# Altium PCB pcb-ldc-hw.PcbDoc (part 1 of 2)
Units mm, origin at the board's own origin, x right, y up, seen from the top; angles counter-clockwise.
Board outline 120 x 80 mm, 2 copper layers (Top Layer, Bottom Layer); 78 components, 30 nets, 198 pads, 2 vias.
Unrouted connection lines stored in the file: 33.
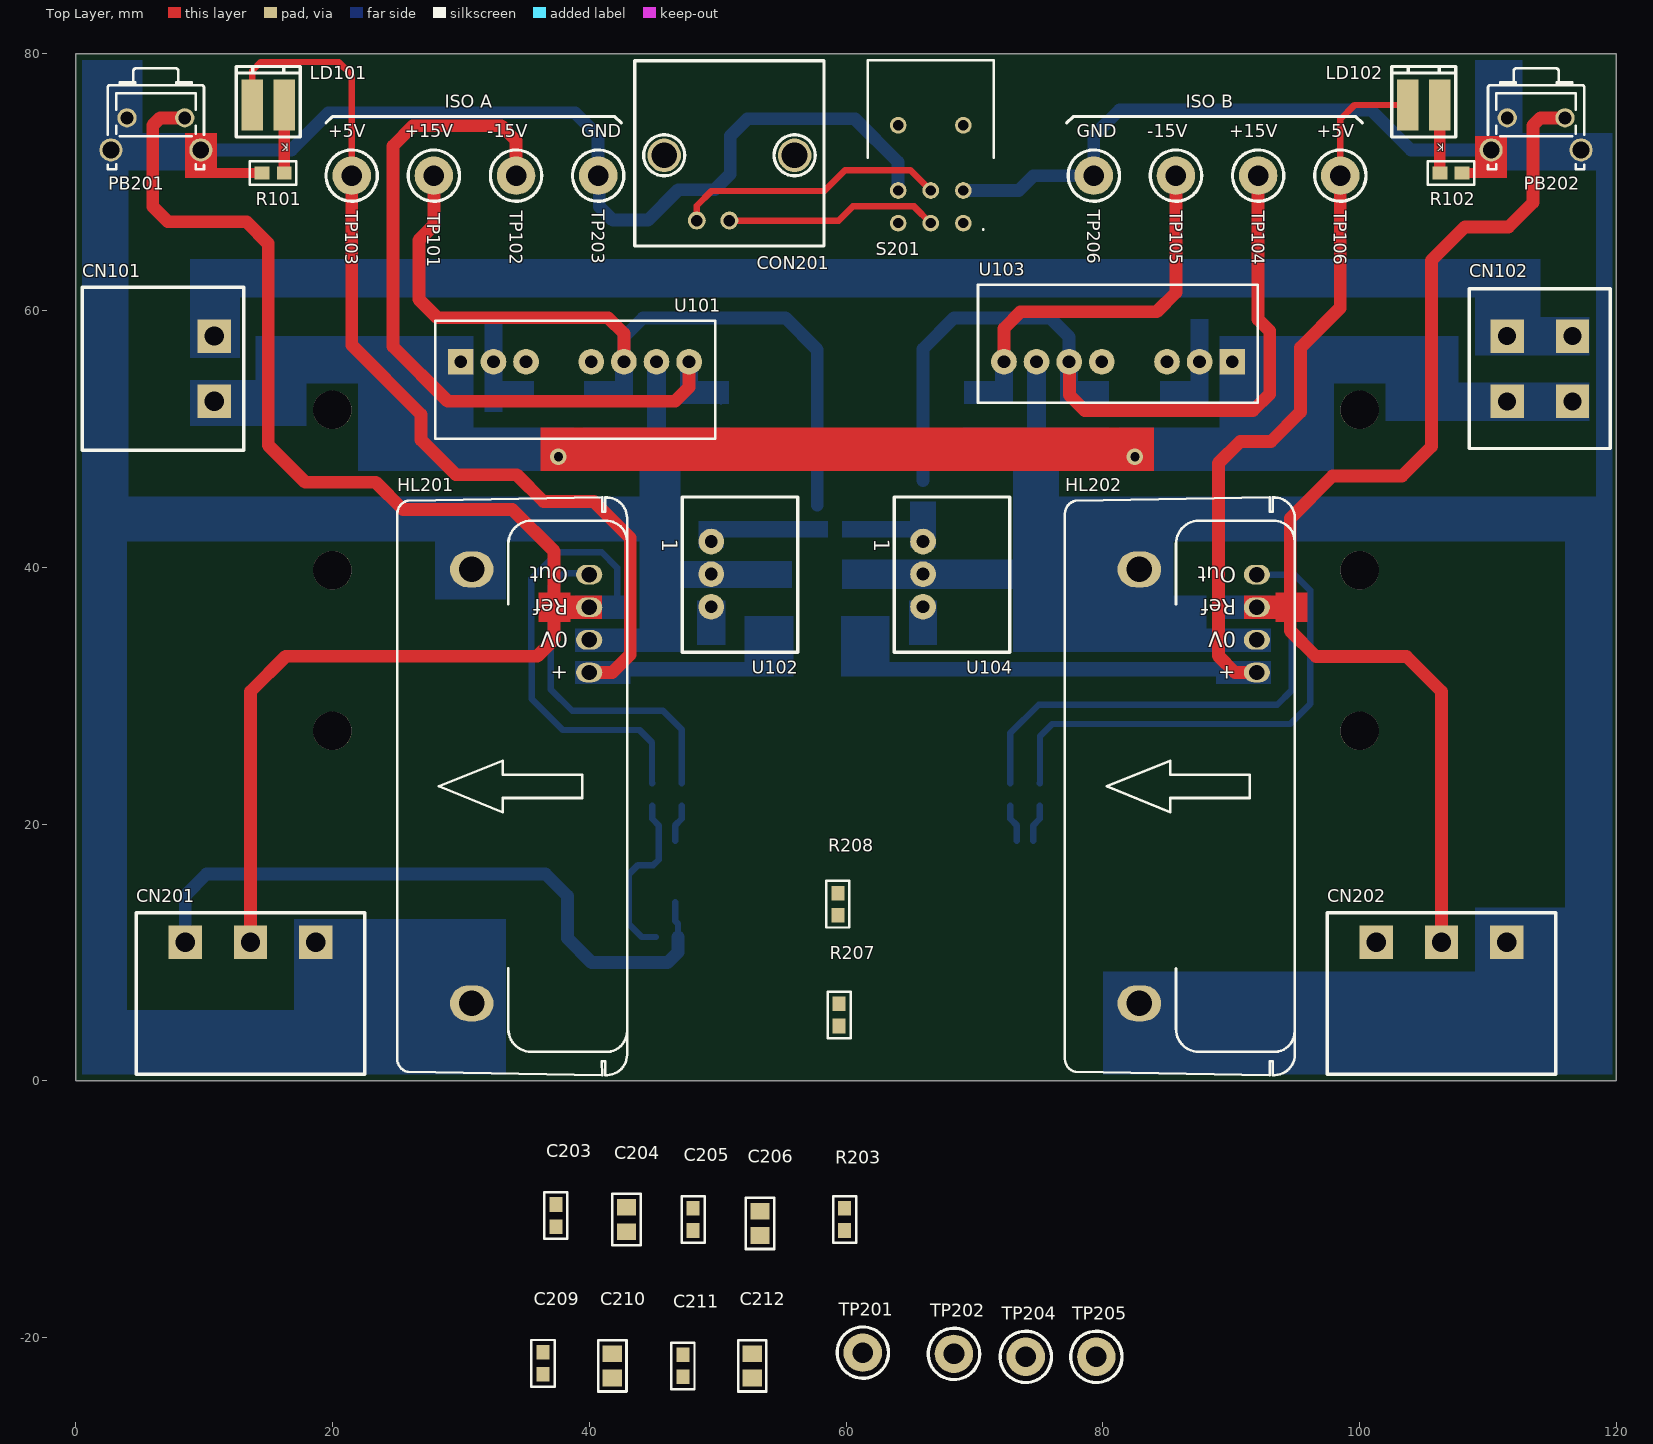
[diagram p0: Top Layer view]
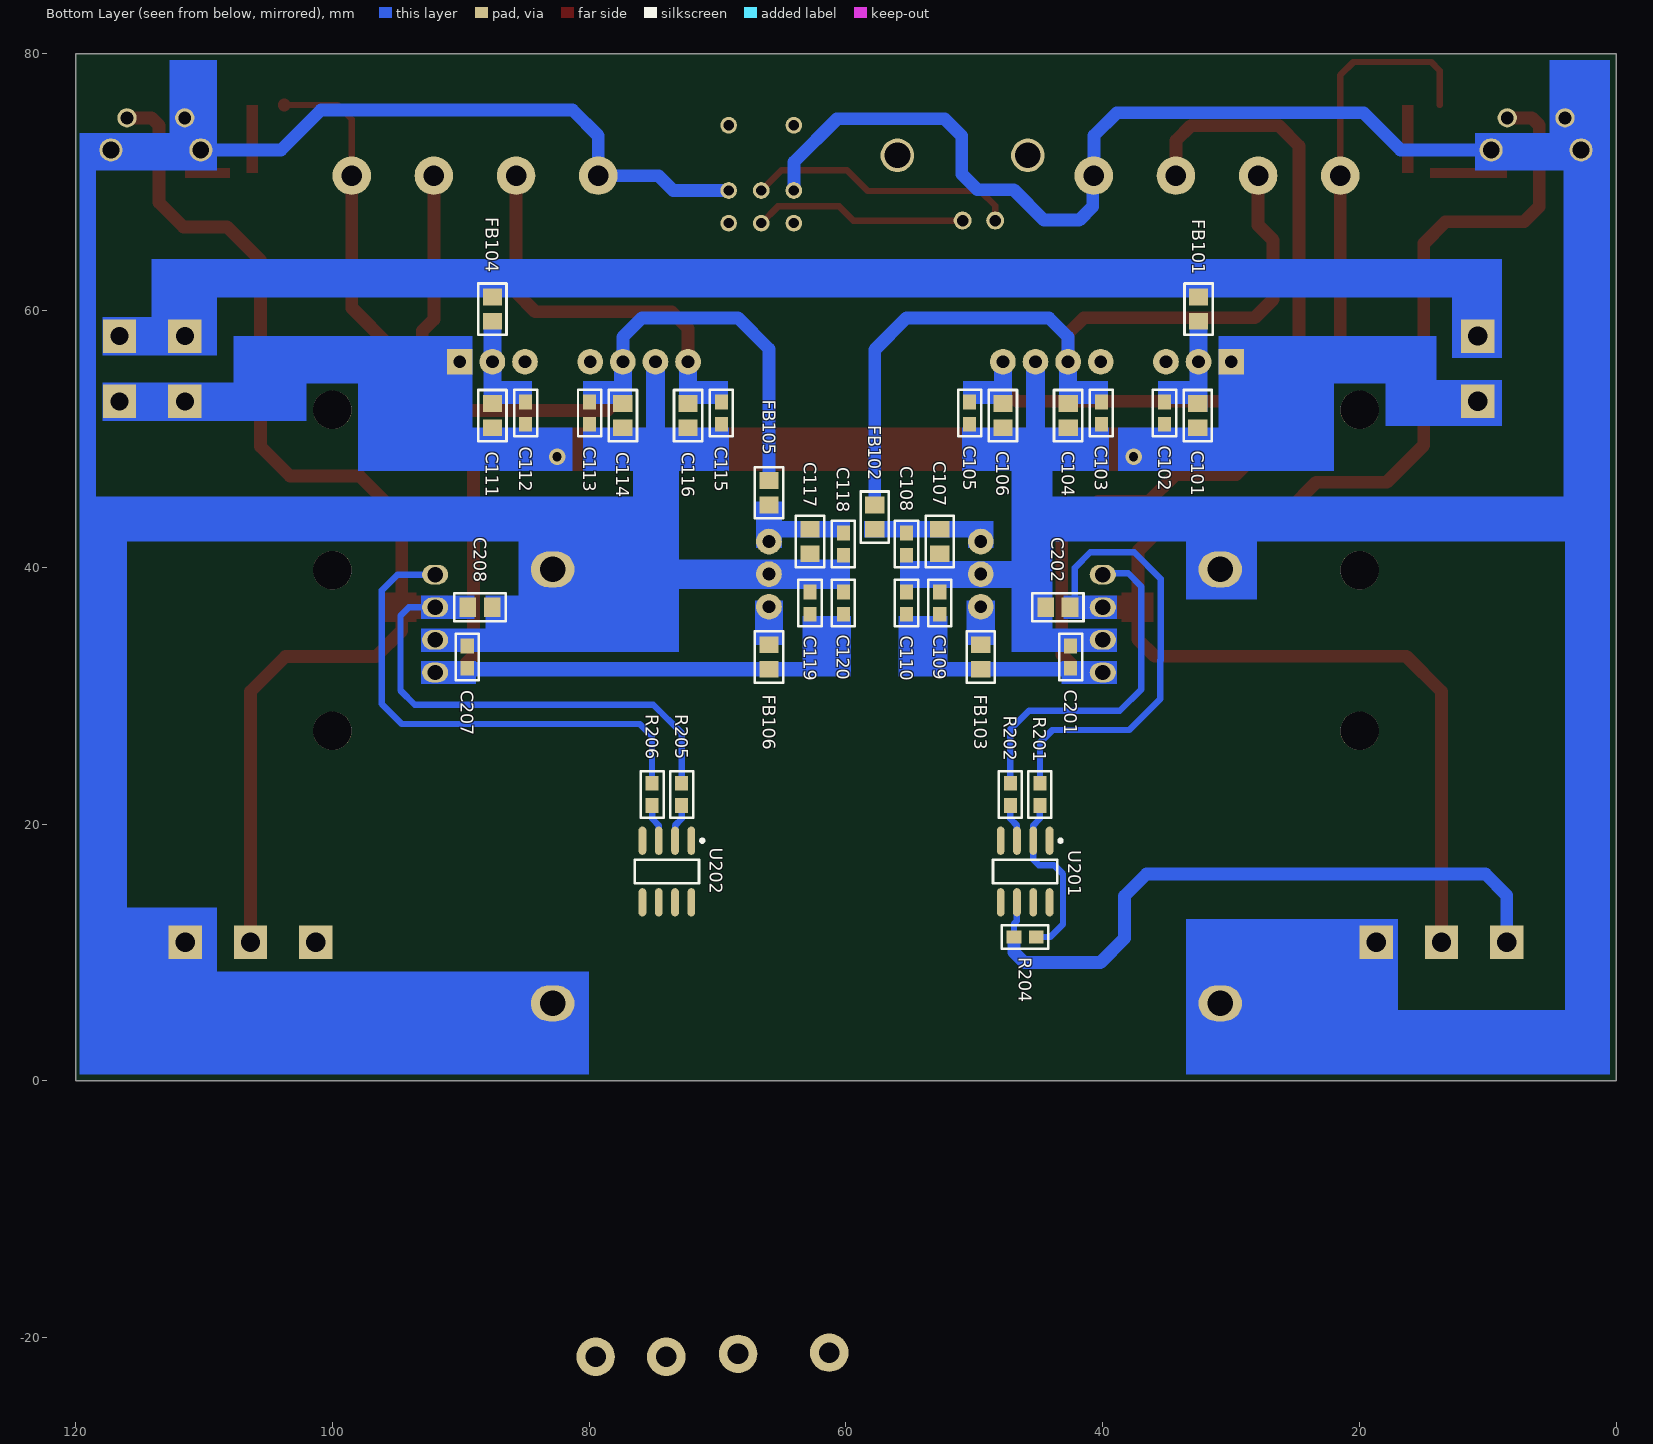
[diagram p1: Bottom Layer view, seen from below]

## Layer stack, top to bottom
Top Solder: solder mask 0.0102, Solder Resist, Dk 3.5
Top Layer: signal copper 0.0356
Dielectric 1: dielectric 0.32, FR-4, Dk 4.8
Bottom Layer: signal copper 0.0356
Bottom Solder: solder mask 0.0102, Solder Resist, Dk 3.5

## Board outline
0,0 0,80 120,80 120,0

## Design rules (kind name [scope] priority, off if disabled: settings)
Clearance [All] p1: gap=0.254 ignorepadtopadclearanceinfootprint=FALSE except(0: Arc-Hole Track-Hole SMDPad-Hole THPad-Hole Via-Hole Fill-Hole Poly-Hole Region-Hole Text-Hole)
Height [All] p1: minheight=0 maxheight=50 prefheight=12.7
PolygonConnect [All] p1: connectstyle=Relief reliefconductorwidth=0.254 reliefentries=4 polygonreliefangle="90 Angle" airgapwidth=0.254
RoutingVias [All] p1: holewidth=0.711 width=1.27 viastyle="Through Hole" minholewidth=0.711 minwidth=1.27 maxholewidth=0.711 maxwidth=1.27
SolderMaskExpansion [All] p1: expansion=0.102 istentingtop=FALSE
Width [All] p1: maxlimit=2 minlimit=0.254 preferedwidth=0.254 minimp=50.000000 maximp=50.000000 favimp=50.000000
29 further rules are at their usual default settings.

## Classes and differential pairs
component class power-supply-ldc-hw: C101 C102 C103 C104 C105 C106 C107 C108 C109 C110 C111 C112 C113 C114 C115 C116 C117 C118 C119 C120 CN101 CN102 FB101 FB102 FB103 FB104 FB105 FB106 LD101 LD102 R101 R102 TP101 TP102 TP103 TP104 TP105 TP106 U101 U102 U103 U104
component class detection-circuit-ldc-hw: C201 C202 C203 C204 C205 C206 C207 C208 C209 C210 C211 C212 CN201 CN202 CON201 HL201 HL202 PB201 PB202 R201 R202 R203 R204 R205 R206 R207 R208 TP201 TP202 TP203 TP204 TP205 TP206 U201 U202

## Components (designator, comment, footprint, x,y, rotation, side; value= is the part's Value field where it differs from the comment)
C101 "10uF/35V" C0805 32.6,51.8 r270 bottom
C102 "100nF/50V" C0603 35.19,52 r90 bottom
C103 "100nF/50V" C0603 40.11,52 r90 bottom
C104 "10uF/35V" C0805 42.7,51.8 r270 bottom
C105 "100nF/50V" C0603 50.37,52 r90 bottom
C106 "10uF/35V" C0805 47.78,51.8 r270 bottom
C107 "10uF/35V" C0805 52.7,42 r270 bottom
C108 "100nF/50V" C0603 55.29,41.8 r90 bottom
C109 "100nF/50V" C0603 52.7,37.2 r270 bottom
C110 "10uF/16V" C0603 55.29,37.2 r270 bottom
C111 "10uF/35V" C0805 87.54,51.8 r270 bottom
C112 "100nF/50V" C0603 84.95,52 r90 bottom
C113 "100nF/50V" C0603 79.97,52 r90 bottom
C114 "10uF/35V" C0805 77.38,51.8 r270 bottom
C115 "100nF/50V" C0603 69.71,52 r90 bottom
C116 "10uF/35V" C0805 72.3,51.8 r270 bottom
C117 "10uF/35V" C0805 62.8,42 r270 bottom
C118 "100nF/50V" C0603 60.21,41.8 r90 bottom
C119 "100nF/50V" C0603 62.8,37.2 r270 bottom
C120 "10uF/16V" C0603 60.21,37.2 r270 bottom
C201 "1uF/16V" C0603 42.5,33 r90 bottom
C202 "220nF/50V" C0805 43.5,36.88 r180 bottom
C203 "100nF/50V" C0603 37.4,-10.5 r90 top
C204 "10uF/35V" C0805 42.9,-10.8 r90 top
C205 "100nF/50V" C0603 48.1,-10.8 r90 top
C206 "10uF/35V" C0805 53.3,-11.1 r90 top
C207 "1uF/16V" C0603 89.5,33 r90 bottom
C208 "220nF/50V" C0805 88.5,36.88 r0 bottom
C209 "100nF/50V" C0603 36.4,-22 r90 top
C210 "10uF/35V" C0805 41.8,-22.2 r90 top
C211 "100nF/50V" C0603 47.3,-22.2 r90 top
C212 "10uF/35V" C0805 52.7,-22.2 r90 top
CN101 "1757242" "CONECTOR PHOENIX CONTACT 1757242" 10.8,58 r270 top locked
CN102 "1786404" "CONECTOR PHOENIX CONTACT 1786404" 111.5,58 r90 top locked
CN201 "1757255" "CONECTOR PHOENIX CONTACT 1757255" 13.62,10.8 r0 top locked
CN202 "1757255" "CONECTOR PHOENIX CONTACT 1757255" 106.38,10.8 r0 top locked
CON201 "BNC_Connector" BNC_RIGHTANGLE 56,72.08 r0 top locked
FB101 "BLM21PG221SN1D" FERRITE_BEAD_0805 32.54,60.1 r90 bottom
FB102 "BLM21PG221SN1D" FERRITE_BEAD_0805 57.76,43.9 r90 bottom
FB103 "BLM21PG221SN1D" FERRITE_BEAD_0805 49.5,33 r90 bottom
FB104 "BLM21PG221SN1D" FERRITE_BEAD_0805 87.54,60.1 r90 bottom
FB105 "BLM21PG221SN1D" FERRITE_BEAD_0805 66,45.8 r90 bottom
FB106 "BLM21PG221SN1D" FERRITE_BEAD_0805 66,33 r90 bottom
HL201 "CTSR 0.3-P" "LEM_CTSR 0.3-P" 40,31.8 r90 top locked
HL202 "CTSR 0.3-P" "LEM_CTSR 0.3-P" 92,31.8 r90 top locked
LD101 "LB A673-L2P1-35-Z" 2-SMD 15,76 r180 top locked
LD102 "LB A673-L2P1-35-Z" 2-SMD 105,76 r180 top locked
PB201 "SKHHLMA010" PB_ALPS_SKHHLMA010 4,75 r270 top locked
PB202 "SKHHLMA010" PB_ALPS_SKHHLMA010 111.5,75 r270 top locked
R101 "499R" R0603 15.38,70.7 r0 top
R102 "499R" R0603 107.12,70.7 r180 top
R201 "15K" R0603 44.9,22.3 r270 bottom
R202 "15K" R0603 47.2,22.3 r270 bottom
R203 "75K" R0603 59.9,-10.8 r90 top
R204 "75K" R0603 46.05,11.2 r0 bottom
R205 "15K" R0603 72.8,22.3 r270 bottom
R206 "15K" R0603 75.1,22.3 r270 bottom
R207 "75K" R0603 59.47,5.13 r90 top
R208 "75K" R0603 59.36,13.75 r270 top
S201 "AS22AH" AS22AH 66.6,66.8 r180 top locked
TP101 "Test Point White 5012" "TEST POINT" 27.9,70.5 r0 top
TP102 "Test Point White 5012" "TEST POINT" 34.3,70.5 r0 top
TP103 "Test Point White 5012" "TEST POINT" 21.5,70.5 r180 top
TP104 "Test Point White 5012" "TEST POINT" 92.1,70.5 r0 top
TP105 "Test Point White 5012" "TEST POINT" 85.7,70.5 r0 top
TP106 "Test Point White 5012" "TEST POINT" 98.5,70.5 r0 top
TP201 "Test Point White 5012" "TEST POINT" 61.31,-21.17 r0 top
TP202 "Test Point White 5012" "TEST POINT" 68.41,-21.27 r0 top
TP203 "Test Point White 5012" "TEST POINT" 40.7,70.5 r0 top
TP204 "Test Point White 5012" "TEST POINT" 74,-21.5 r0 top
TP205 "Test Point White 5012" "TEST POINT" 79.5,-21.5 r0 top
TP206 "Test Point White 5012" "TEST POINT" 79.3,70.5 r0 top
U101 "RS-1215D" SIP7 30,56 r270 top locked
U102 "R-78E5.0-0.5" R-78E5.0-0.5 49.5,42 r270 top locked
U103 "RS-1215D" SIP7 90.08,56 r90 top locked
U104 "R-78E5.0-0.5" R-78E5.0-0.5 66,42 r270 top locked
U201 "OPA227U" SOIC_8_N 46.05,16.3 r270 bottom
U202 "OPA227U" SOIC_8_N 73.95,16.3 r270 bottom

## Footprints (in the part's own frame and the unit in brackets; to place one, negate y for a bottom-side part, rotate by r counter-clockwise, add the part's x,y. Pads: shape width x height; smd on the part's side, far side on the other; paste and mask are expansions set on the pad)
2-SMD [mm]
  rect 1.7x4 smd: 1(-1.25,0) 2(1.25,0)
  silkscreen extent -2.5,-3 2.5,2.5, body extent -2,-2.03 2,1.73, height 4.03
AS22AH [mm]
  round 1.3 hole 0.8: 1(-2.54,0) 2(0,0) 3(2.54,0) 4(-2.54,-2.54) 5(0,-2.54) 6(2.54,-2.54) MH1(-2.54,-7.62) MH2(2.54,-7.62)
  silkscreen extent -4.9,-12.7 4.9,0.55, body extent -4.9,-14.91 4.9,0.3, height 10.09
BNC_RIGHTANGLE [mm] "BNC Jack Female Socket Right Angle"
  round 2.61 hole 2.01: 0(-10.16,0) 0(0,0)
  round 1.4 hole 0.89: 1(-5.08,-5.08) 2(-7.62,-5.08)
  silkscreen extent -12.46,-7.06 2.29,7.36, body extent -12.46,-7 2.3,28.5, height 13.26
C0603 [mil]
  rect 45x40 smd: 1(-33.96,0) 2(33.97,0)
  silkscreen extent -71,-35 71,36, body extent -31,-16 31,16, height 12
C0805 [mm]
  rect 1.3x1.5 smd: 1(0.95,0) 2(-0.95,0)
  silkscreen extent -2,-1.1 2,1.1, body extent -1,-0.62 1,0.63, height 0.79
"CONECTOR PHOENIX CONTACT 1757242" [mm]
  rect 2.6x2.6 hole 1.5: 1(0,0) 2(5.075,0)
  silkscreen extent -3.81,-10.29 8.89,2.29, body extent -3.54,-10 8.62,2, height 8.61
"CONECTOR PHOENIX CONTACT 1757255" [mm]
  rect 2.6x2.6 hole 1.5: 1(-5.08,0) 2(0,0) 3(5.08,0)
  silkscreen extent -8.89,-10.29 8.89,2.29, body extent -8.62,-10 8.62,2, height 8.61
"CONECTOR PHOENIX CONTACT 1786404" [mm]
  rect 2.6x2.6 hole 1.4: 1(-5.08,0) 2(0,0) 3(-5.08,-5.08) 4(0,-5.08)
  silkscreen extent -8.76,-8.03 3.68,2.95, body extent -8.62,-16.19 3.54,2.81, height 10.25
FERRITE_BEAD_0805 [mm]
  rect 1.3x1.5 smd: 1(0.95,0) 2(-0.95,0)
  silkscreen extent -2,-1.1 2,1.1, body extent -1,-0.6 1,0.6, height 1.31
"LEM_CTSR 0.3-P" [mm] "LEM Current Transducer, Body 45x17.9mm, CTSR Series"
  oval 1.524x2.032 hole 1.2: 1(0,0) 2(2.54,0) 3(5.08,0) 4(7.62,0)
  oval 2.8x3.4 hole 2: 5(-25.77,9.15) 6(8.03,9.15)
  silkscreen extent -31.37,-2.95 13.64,14.95, body extent -31.37,-2.96 13.65,14.95, height 44.61
PB_ALPS_SKHHLMA010 [mm]
  round 1.5 hole 1: 1(0,0) 2(0,4.5)
  round 1.8 hole 1.3: 3(2.5,-1.25) 4(2.5,5.75)
  silkscreen extent -3.85,-1.5 4,6, body extent -3.82,-2 4.08,6.5, height 7.45
R0603 [mil]
  rect 45x40 smd: 1(-33.96,0) 2(33.96,0)
  silkscreen extent -71,-35 71,36, body extent -31,-18 31,18, height 20
R-78E5.0-0.5 [mm]
  round 2 hole 1: 1(0,0) 2(2.54,0) 3(5.08,0)
  silkscreen extent -3.47,-2.25 8.62,6.75, body extent -3.21,-2 8.39,6.5, height 10.45
SIP7 [mm]
  rect 2x2 hole 1: 1(0,0)
  round 2 hole 1: 2(0,2.54) 3(0,5.08) 5(0,10.16) 6(0,12.7) 7(0,15.24) 8(0,17.78)
  silkscreen extent -3.2,-2 6,19.8, body extent -3.2,-2 6,19.8, height 11.15
SOIC_8_N [mm] "SOIC, 8-Leads, Body 4.9x3.9mm, Pitch 1.27mm, IPC Medium Density"
  oval 2.2x0.6 smd: 1(-2.4,1.905) 2(-2.4,0.635) 3(-2.4,-0.635) 4(-2.4,-1.905) 5(2.4,-1.905) 6(2.4,-0.635) 7(2.4,0.635) 8(2.4,1.905)
  silkscreen extent -2.52,-2.5 0.9,2.88, body extent -3,-2.45 3,2.45, height 1.61
"TEST POINT" [mm] "Test Point White 5012"
  round 3 hole 1.6 paste+0: 1(0,0)
  silkscreen extent -2,-2 2,2, body extent -1.59,-1.59 1.59,1.59, height 8.17

## Part data
C101 C104 C106 C107 C111 C114 C116 C117 C204 C206 C210 C212: library part "Capacitor 10uF/35V", "CAP CER 10UF 35V X5R 0805", Capacitance=10uF, Case Code (Imperial)=0805, Case Code (Metric)=2012, Dielectric=X5R, Dielectric Material=Ceramic, Manufacturer=TDK, Manufacturer Part Number=C2012X5R1V106K085AC, Max Operating Temperature=85°C, Min Operating Temperature=-55°C, Package Quantity=1, Supplier Part Number 1=445-14417-1-ND, Tolerance=10%, Voltage Rating=35V, Case/Package=0805, ComponentLink1Description=https://datasheet.ciiva.com/14894/tdkmlcccaprange-14894527.pdf, ComponentLink1URL=https://datasheet.ciiva.com/14894/tdkmlcccaprange-14894527.pdf, Código LNLS=AP105062, Height=0.85mm, Lead Free="Lead Free", Length=0.079inch, Packaging="Tape and Reel", Pricing 1="1=0.73, 10=0.519, 100=0.3416, 500=0.253, 1000=0.2151 (USD)", REACH SVHC="No SVHC", Stock 1=56135, Supplier 1=Digi-Key, Termination=SMD/SMT, Thickness=0.039inch, Voltage Rating (DC)=35V, Weight=0.000194oz, Width=0.049inch
C102 C103 C105 C108 C109 C112 C113 C115 C118 C119 C203 C205 C209 C211: library part "Capacitor 100nF/50V", "CAP CER 0.1UF 50V X7R 0603", Capacitance=100nF, Case Code (Imperial)=0603, Case Code (Metric)=1608, Dielectric=X7R, Dielectric Material=Ceramic, Manufacturer=TDK, Manufacturer Part Number=C1608X7R1H104K080AA, Max Operating Temperature=125°C, Min Operating Temperature=-55°C, Package Quantity=1, Supplier Part Number 1=445-1314-1-ND, Tolerance=10%, Voltage=50V, Case/Package=0603, Category="Ceramic Capacitors", ComponentLink1Description=https://datasheet.ciiva.com/14498/1756137-14498091.pdf?src-supplier=Farnell, ComponentLink1URL=https://datasheet.ciiva.com/14498/1756137-14498091.pdf?src-supplier=Farnell, ComponentLink2Description=https://datasheet.ciiva.com/11788/0900766b80c1bb00-11788073.pdf?src-supplier=RSComponents, ComponentLink2URL=https://datasheet.ciiva.com/11788/0900766b80c1bb00-11788073.pdf?src-supplier=RSComponents, ComponentLink3Description=https://datasheet.ciiva.com/6293/tdkmlcccaprange-6293190.pdf?src-supplier=Digi-Key, ComponentLink3URL=https://datasheet.ciiva.com/6293/tdkmlcccaprange-6293190.pdf?src-supplier=Digi-Key, ComponentLink4Description=https://datasheet.ciiva.com/6293/tdkmlcccaprange-6293193.pdf?src-supplier=Digi-Key, ComponentLink4URL=https://datasheet.ciiva.com/6293/tdkmlcccaprange-6293193.pdf?src-supplier=Digi-Key, ComponentLink5Description=https://datasheet.ciiva.com/6293/tdkmlcccaprange-6293194.pdf?src-supplier=Digi-Key, ComponentLink5URL=https://datasheet.ciiva.com/6293/tdkmlcccaprange-6293194.pdf?src-supplier=Digi-Key, ComponentLink6Description=https://datasheet.ciiva.com/22749/1744655-22749597.pdf?src-supplier=Element14, ComponentLink6URL=https://datasheet.ciiva.com/22749/1744655-22749597.pdf?src-supplier=Element14, ComponentLink7Description=https://datasheet.ciiva.com/17487/e412-c-17487370.pdf?src-supplier=Avnet+Europe, ComponentLink7URL=https://datasheet.ciiva.com/17487/e412-c-17487370.pdf?src-supplier=Avnet+Europe, Construction=Flat, Código LNLS=AP107349, Depth=0.8mm, Height=0.8mm, Lead Free="Lead Free", Length=1.6mm, Mount="Surface Mount", Number of Pins=2, Packaging="Tape and Reel", Pricing 1="1=0,11000, 10=0,08000, 50=0,04520, 100=0,03750, 500=0,02630, 1000=0,02178 (USD)", Radiation Hardening=No, REACH SVHC="No SVHC", Resistor Type=Ceramic, RoHS=Yes, RoHS Compliant=Yes, Series=C, Stock 1=4478231, Supplier 1=Digi-Key, Termination=SMD/SMT, Thickness=0.037inch, Voltage Rating=50V, Voltage Rating (DC)=50V, Weight=7.1E-05oz, Width=0.031inch
C110 C120: library part "Capacitor 10uF/16V", "CAP CER 10UF 16V X5R 0603", Capacitance=10uF, Case Code (Imperial)=0603, Case Code (Metric)=1608, Dielectric=X5R, Dielectric Material=Ceramic, Manufacturer=TDK, Manufacturer Part Number=C1608X5R1C106M080AB, Max Operating Temperature=85°C, Min Operating Temperature=-55°C, Package Quantity=4000, Supplier Part Number 1=445-9065-1-ND, Tolerance=20%, Voltage Rating=16V, Case/Package=0603, ComponentLink1Description=https://datasheet.ciiva.com/26946/getdatasheetpartid-727879-26946512.pdf, ComponentLink1URL=https://datasheet.ciiva.com/26946/getdatasheetpartid-727879-26946512.pdf, ComponentLink2Description=https://datasheet.ciiva.com/24216/mlcc-commercial-general-en-24216005.pdf, ComponentLink2URL=https://datasheet.ciiva.com/24216/mlcc-commercial-general-en-24216005.pdf, ComponentLink3Description=https://datasheet.ciiva.com/16449/mlcc-commercial-general-en-16449581.pdf, ComponentLink3URL=https://datasheet.ciiva.com/16449/mlcc-commercial-general-en-16449581.pdf, Composition=Ceramic, Código LNLS=AP105460, Depth=0.8mm, Height=0.8mm, Lead Free="Lead Free", Length=1.6mm, Packaging="Tape and Reel", Pricing 1="1=0.75, 10=0.553, 100=0.3795, 500=0.3004, 1000=0.253 (USD)", Radiation Hardening=No, REACH SVHC="No SVHC", Stock 1=85682, Supplier 1=Digi-Key, Termination=SMD/SMT, Thickness=0.039inch, Voltage Rating (DC)=16V, Weight=7.1E-05oz, Width=0.031inch
C201 C207: library part "Capacitor 1uF/16V", "CAP CER 1UF 16V X7R 0603", Capacitance=1uF, Case Code (Imperial)=0603, Case Code (Metric)=1608, Dielectric=X7R, Dielectric Material=Ceramic, Manufacturer=TDK, Manufacturer Part Number=C1608X7R1C105K080AC, Max Operating Temperature=125°C, Min Operating Temperature=-55°C, Package Quantity=1, Supplier Part Number 1=87R3669, Tolerance=10%, Voltage=16V, Case/Package=0603, Category="Ceramic Capacitors", ComponentLink1Description=https://datasheet.ciiva.com/11788/0900766b80c1bb00-11788075.pdf?src-supplier=RSComponents, ComponentLink1URL=https://datasheet.ciiva.com/11788/0900766b80c1bb00-11788075.pdf?src-supplier=RSComponents, ComponentLink2Description=https://datasheet.ciiva.com/22648/1796654-22648704.pdf?src-supplier=Element14, ComponentLink2URL=https://datasheet.ciiva.com/22648/1796654-22648704.pdf?src-supplier=Element14, ComponentLink3Description=https://datasheet.ciiva.com/6156/1571323-6156168.pdf?src-supplier=Farnell, ComponentLink3URL=https://datasheet.ciiva.com/6156/1571323-6156168.pdf?src-supplier=Farnell, ComponentLink4Description=https://datasheet.ciiva.com/6250/tdkmlcccaprange-6250871.pdf?src-supplier=Digi-Key, ComponentLink4URL=https://datasheet.ciiva.com/6250/tdkmlcccaprange-6250871.pdf?src-supplier=Digi-Key, ComponentLink5Description=https://datasheet.ciiva.com/48671/e412-c-48671305.pdf?src-supplier=Avnet, ComponentLink5URL=https://datasheet.ciiva.com/48671/e412-c-48671305.pdf?src-supplier=Avnet, ComponentLink6Description=https://datasheet.ciiva.com/26285/3025c1608x7r1c105k080ac-26285242.pdf?src-supplier=Onlinecomponents.com, ComponentLink6URL=https://datasheet.ciiva.com/26285/3025c1608x7r1c105k080ac-26285242.pdf?src-supplier=Onlinecomponents.com, ComponentLink7Description=https://datasheet.ciiva.com/22694/1796654-22694127.pdf?src-supplier=Element14, ComponentLink7URL=https://datasheet.ciiva.com/22694/1796654-22694127.pdf?src-supplier=Element14, ComponentLink8Description=https://datasheet.ciiva.com/22749/1744655-22749595.pdf?src-supplier=Element14, ComponentLink8URL=https://datasheet.ciiva.com/22749/1744655-22749595.pdf?src-supplier=Element14, ComponentLink9Description=https://datasheet.ciiva.com/16199/e412-c-16199815.pdf?src-supplier=Future+Electronics, ComponentLink9URL=https://datasheet.ciiva.com/16199/e412-c-16199815.pdf?src-supplier=Future+Electronics, ComponentLink10Description=https://datasheet.ciiva.com/15192/getdatasheetpartid-715881-15192029.pdf?src-supplier=Verical, ComponentLink10URL=https://datasheet.ciiva.com/15192/getdatasheetpartid-715881-15192029.pdf?src-supplier=Verical, ComponentLink11Description=https://datasheet.ciiva.com/17487/e412-c-17487343.pdf?src-supplier=Avnet+Europe, ComponentLink11URL=https://datasheet.ciiva.com/17487/e412-c-17487343.pdf?src-supplier=Avnet+Europe, Construction=Flat, Código LNLS=AP105441, Depth=0.8mm, Height=0.8mm, Lead Free="Lead Free", Length=1.6mm, Mount="Surface Mount", Packaging="Tape and Reel", Pricing 1="1=0,02900, 4000=0,02800, 8000=0,02600 (USD)", Radiation Hardening=No, REACH SVHC="No SVHC", Resistor Type=Ceramic, RoHS=Yes, RoHS Compliant=Yes, Series=C, Stock 1=68000, Supplier 1=Newark, Termination=SMD/SMT, Thickness=0.037inch, Voltage Rating=16V, Voltage Rating (DC)=16V, Weight=7.1E-05oz, Width=0.031inch
C202 C208: library part "Capacitor 220nF/50V", "CAP CER 220NF 50V X7R 0805", Capacitance=220nF, Case Code (Imperial)=0805, Case Code (Metric)=2012, Dielectric=X7R, Manufacturer=Murata, Manufacturer Part Number=GRM21BR71H224MA01L, Max Operating Temperature=125°C, Min Operating Temperature=-55°C, Package Quantity=1, Supplier Part Number 1=490-1671-1-ND, Tolerance=20%, Voltage Rating=50V, Case/Package=0805, Category="Ceramic Capacitors", ComponentLink1Description=https://datasheet.ciiva.com/5421/product-5421097.pdf?src-supplier=Mouser, ComponentLink1URL=https://datasheet.ciiva.com/5421/product-5421097.pdf?src-supplier=Mouser, ComponentLink2Description=https://datasheet.ciiva.com/136/partnumbering-e-01-136537.pdf?src-supplier=Digi-Key, ComponentLink2URL=https://datasheet.ciiva.com/136/partnumbering-e-01-136537.pdf?src-supplier=Digi-Key, ComponentLink3Description=https://datasheet.ciiva.com/136/partnumbering-e-01-136536.pdf?src-supplier=Digi-Key, ComponentLink3URL=https://datasheet.ciiva.com/136/partnumbering-e-01-136536.pdf?src-supplier=Digi-Key, ComponentLink4Description=https://datasheet.ciiva.com/136/partnumbering-e-01-136538.pdf?src-supplier=Digi-Key, ComponentLink4URL=https://datasheet.ciiva.com/136/partnumbering-e-01-136538.pdf?src-supplier=Digi-Key, Construction=Flat, Código LNLS=AP112018, Depth=1.25mm, Height=1.25mm, Lead Free="Lead Free", Length=2mm, Mount="Surface Mount", Packaging="Tape and Reel", Pricing 1="1=0,37000, 10=0,25200, 50=0,16800, 100=0,14270, 500=0,10074, 1000=0,08815 (USD)", Radiation Hardening=No, RoHS=Yes, RoHS Compliant=Yes, Series=GRM, Stock 1=27774, Supplier 1=Digi-Key, Termination=SMD/SMT, Thickness=0.053inch, Voltage Rating (DC)=50V, Width=0.049inch
CN101: library part "Conector Phoenix Contact 1757242", "TERM BLOCK HDR 2POS 90DEG 5.08MM", Colour=Green,Grey, Current=15A, Current Rating=12A, Flammability Rating="UL94 V-0", Housing Colour=Green, Manufacturer="Phoenix Contact", Package Quantity=50, Supplier Part Number 1=277-1106-ND, Voltage=300V, Voltage Rating=250V, Voltage Rating (DC)=320V, Approvals=UL,CSA,VDE,EN, ComponentLink1Description=https://datasheet.ciiva.com/15197/getdatasheetpartid-176350-15197328.pdf, ComponentLink1URL=https://datasheet.ciiva.com/15197/getdatasheetpartid-176350-15197328.pdf, ComponentLink2Description=https://datasheet.ciiva.com/16096/1757242-16096402.pdf, ComponentLink2URL=https://datasheet.ciiva.com/16096/1757242-16096402.pdf, ComponentLink3Description=https://datasheet.ciiva.com/7630/100955-7630839.pdf, ComponentLink3URL=https://datasheet.ciiva.com/7630/100955-7630839.pdf, ComponentLink4Description=https://datasheet.ciiva.com/795/1757242-795407.pdf, ComponentLink4URL=https://datasheet.ciiva.com/795/1757242-795407.pdf, ComponentLink5Description=https://datasheet.ciiva.com/33105/1757242-33105868.pdf, ComponentLink5URL=https://datasheet.ciiva.com/33105/1757242-33105868.pdf, ComponentLink6Description=https://datasheet.ciiva.com/29210/569017-da-01-en-grundgehaeuse-1757242-250-st-29210285.pdf, ComponentLink6URL=https://datasheet.ciiva.com/29210/569017-da-01-en-grundgehaeuse-1757242-250-st-29210285.pdf, Contact Plating=Tin, Código LNLS=MT106521, Depth=12mm, Gender=Male, Housing Material=Polyamide, Lead Free="Lead Free", Length=12.16mm, Manufacturer Part Number=1757242, Max Current Rating=12A, Mount="Through Hole", Number of Contacts=2, Number of Levels=1, Number of Poles=2, Number of Positions=2, Number of Positions Per Level=2, Number of Rows=1, Orientation="Right Angle", Packaging=Bulk, Pitch=5.08mm, Pricing 1="1=0.59, 10=0.564, 50=0.539, 100=0.5243, 250=0.49, 500=0.4508, 1000=0.4165, 2500=0.3969, 5000=0.3724 (USD)", REACH SVHC="No SVHC", Stock 1=5888, Supplier 1=Digi-Key, Termination=Solder, Weight=5.396916oz, Width=5.08mm
CN102: library part "Conector Phoenix Contact 1786404", "PLUG TERM BLOCK HDR 2POS 90DEG 5.08MM", Color=Green, Current=10A, Current Rating=12A, Flammability Rating="UL94 V-0", Manufacturer="Phoenix Contact", Package Quantity=50, Supplier Part Number 1=277-5986-ND, Voltage=300V, Voltage Rating=320V, Approvals=UL,CSA,VDE,CB,GOST, Category="Terminal Blocks", ComponentLink1Description=https://datasheet.ciiva.com/16096/1786404-16096800.pdf?src-supplier=Onlinecomponents.com, ComponentLink1URL=https://datasheet.ciiva.com/16096/1786404-16096800.pdf?src-supplier=Onlinecomponents.com, ComponentLink2Description=https://datasheet.ciiva.com/6747/1786404-6747449.pdf?src-supplier=Digi-Key, ComponentLink2URL=https://datasheet.ciiva.com/6747/1786404-6747449.pdf?src-supplier=Digi-Key, ComponentLink3Description=https://datasheet.ciiva.com/11748/0900766b800b6097-11748807.pdf?src-supplier=RSComponents, ComponentLink3URL=https://datasheet.ciiva.com/11748/0900766b800b6097-11748807.pdf?src-supplier=RSComponents, ComponentLink4Description=https://datasheet.ciiva.com/29209/567660-da-01-de-grundgehaeuse-1786404-50-st-29209089.pdf?src-supplier=Conrad, ComponentLink4URL=https://datasheet.ciiva.com/29209/567660-da-01-de-grundgehaeuse-1786404-50-st-29209089.pdf?src-supplier=Conrad, Connector Type=Socket, Contact Material=Tin, Contact Plating=Tin, Código LNLS=MC113986, Depth=19mm, Height=13.7mm, Housing Color=Green, Housing Material=Polyamide, Lead Free="Lead Free", Length=12.16mm, Manufacturer Part Number=1786404, Max Current Rating=12A, Mount="Through Hole", Number of Contacts=2, Number of Levels=1, Number of Poles=2, Number of Positions=2, Number of Positions Per Level=2, Number of Rows=1, Orientation="Right Angle", Packaging=Bulk, Pitch=5.08mm, Pricing 1="1=2,32000, 10=2,25800, 50=2,11000, 100=1,94120, 250=1,79348, 500=1,70910, 1000=1,62470 (USD)", RoHS=Yes, RoHS Compliant=Yes, Series=IC, Stock 1=2375, Supplier 1=Digi-Key, Termination=Solder, Type="Integrated Circuit (IC)", Weight=5.78493oz, Width=19mm
CN201 CN202: library part "Conector Phoenix Contact 1757255", "TERM BLOCK HDR 3POS 90DEG 5.08MM", Colour=Green,Grey, Current=15A, Current Rating=12A, Flammability Rating="UL94 V-0", Housing Colour=Green, Manufacturer="Phoenix Contact", Package Quantity=50, Supplier Part Number 1=277-1107-ND, Voltage=300V, Voltage Rating=250V, Voltage Rating (DC)=320V, Approvals=UL,CSA,VDE,EN, ComponentLink1Description=https://datasheet.ciiva.com/15197/getdatasheetpartid-176351-15197329.pdf, ComponentLink1URL=https://datasheet.ciiva.com/15197/getdatasheetpartid-176351-15197329.pdf, ComponentLink2Description=https://datasheet.ciiva.com/16096/1757255-16096404.pdf, ComponentLink2URL=https://datasheet.ciiva.com/16096/1757255-16096404.pdf, ComponentLink3Description=https://datasheet.ciiva.com/7630/1697152-7630840.pdf, ComponentLink3URL=https://datasheet.ciiva.com/7630/1697152-7630840.pdf, ComponentLink4Description=https://datasheet.ciiva.com/795/1757255-795421.pdf, ComponentLink4URL=https://datasheet.ciiva.com/795/1757255-795421.pdf, ComponentLink5Description=https://datasheet.ciiva.com/29210/569707-da-01-en-grundgehaeuse-1757255-250-st-29210878.pdf, ComponentLink5URL=https://datasheet.ciiva.com/29210/569707-da-01-en-grundgehaeuse-1757255-250-st-29210878.pdf, Connector Type=Plug, Contact Material=Tin, Contact Plating=Tin, Código LNLS=MT112921, Depth=12mm, Gender=Male, Height=12.1mm, Housing Material=Polybutylene, Lead Free="Lead Free", Length=17.24mm, Manufacturer Part Number=1757255, Max Current Rating=12A, Mount="Through Hole", Number of Contacts=3, Number of Levels=1, Number of Poles=3, Number of Positions=3, Number of Positions Per Level=3, Number of Rows=1, Orientation="Right Angle", Packaging=Bulk, Pitch=5.08mm, Pricing 1="1=0.98, 10=0.943, 50=0.902, 100=0.8774, 250=0.82, 500=0.7544, 1000=0.697, 2500=0.6642, 5000=0.6232 (USD)", REACH SVHC="No SVHC", Stock 1=11643, Supplier 1=Digi-Key, Termination=Solder, Weight=5.396916oz, Width=17.16mm
CON201: "Connector BNC Female 0Hz To 2GHz 50 Ohm Solder Right Angle Through Hole Gold Tray", Dielectric Material=PP, Frequency=2Hz, Housing Color=Black, Manufacturer=Molex, Manufacturer Part Number=0731375003, Max Operating Temperature=70°C, Min Operating Temperature=-20°C, Operating Frequency="0 to 2Hz", Package Quantity=384, Supplier Part Number 1=WM5514-ND, Body Material="ZINC ALLOY", Body Plating=Nickel, Category="RF / Coaxial Connectors", Center Contact Plating=Tin, ComponentLink1Description=Datasheet, ComponentLink2Description=https://datasheet.ciiva.com/7002/731375003-sd-7002562.pdf?src-supplier=Digi-Key, ComponentLink2URL=https://datasheet.ciiva.com/7002/731375003-sd-7002562.pdf?src-supplier=Digi-Key, Connector Type=BNC,Receptacle, Contact Material=Bronze, Contact Plating=Gold, Código LNLS=AP107369, Depth=14.76mm, Fastening Type=Bayonet, Impedance=50R, Insulation Material=Polyester, Length=35.18mm, Mount="Through Hole,Panel,Bulkhead", Orientation="Right Angle", Packaging=Bulk, Pricing 1="1=2,54000, 10=2,16200, 80=1,78600, 945=1,41000, 2400=1,31600 (USD)", RoHS=Yes, Series=73137, Stock 1=5198, Supplier 1=Digi-Key, Termination=Solder
FB101 FB102 FB103 FB104 FB105 FB106: "FERRITE BEAD 220 OHM 0805 1LN", Case Code (Imperial)=0805, Case Code (Metric)=2012, Current=2A, DC Resistance (DCR)=45mR, Frequency=100MHz, Manufacturer=Murata, Max Operating Temperature=125°C, Min Operating Temperature=-55°C, Package Quantity=1, Supplier Part Number 1=7241532P, Tolerance=25%, Case/Package=0805, ComponentLink1Description=https://datasheet.ciiva.com/1012/l0110s0100blm21p-1012288.pdf, ComponentLink1URL=https://datasheet.ciiva.com/1012/l0110s0100blm21p-1012288.pdf, ComponentLink2Description=https://datasheet.ciiva.com/11799/0900766b81275e31-11799232.pdf, ComponentLink2URL=https://datasheet.ciiva.com/11799/0900766b81275e31-11799232.pdf, ComponentLink3Description=https://datasheet.ciiva.com/1012/l0110s0100blm21p-1012289.pdf, ComponentLink3URL=https://datasheet.ciiva.com/1012/l0110s0100blm21p-1012289.pdf, ComponentLink4Description=https://datasheet.ciiva.com/14122/anblm21p-data-e-14122214.pdf, ComponentLink4URL=https://datasheet.ciiva.com/14122/anblm21p-data-e-14122214.pdf, ComponentLink5Description=https://datasheet.ciiva.com/3081/l0110s0100blm21p-3081655.pdf, ComponentLink5URL=https://datasheet.ciiva.com/3081/l0110s0100blm21p-3081655.pdf, ComponentLink6Description=https://datasheet.ciiva.com/3081/l0110s0100blm21p-3081656.pdf, ComponentLink6URL=https://datasheet.ciiva.com/3081/l0110s0100blm21p-3081656.pdf, ComponentLink7Description=https://datasheet.ciiva.com/16215/l0110s0100blm21p-16215194.pdf, ComponentLink7URL=https://datasheet.ciiva.com/16215/l0110s0100blm21p-16215194.pdf, ComponentLink8Description=https://datasheet.ciiva.com/8021/1756152-8021596.pdf, ComponentLink8URL=https://datasheet.ciiva.com/8021/1756152-8021596.pdf, ComponentLink9Description=https://datasheet.ciiva.com/30514/1845321-30514028.pdf, ComponentLink9URL=https://datasheet.ciiva.com/30514/1845321-30514028.pdf, ComponentLink10Description=https://datasheet.ciiva.com/8021/1756152-8021598.pdf, ComponentLink10URL=https://datasheet.ciiva.com/8021/1756152-8021598.pdf, ComponentLink11Description=https://datasheet.ciiva.com/1012/l0110s0100blm21p-1012287.pdf, ComponentLink11URL=https://datasheet.ciiva.com/1012/l0110s0100blm21p-1012287.pdf, ComponentLink12Description=https://datasheet.ciiva.com/29348/442529-da-01-en-chip-drossel-0805-220r-2000ma-2-0x1-25mm-29348007.pdf, ComponentLink12URL=https://datasheet.ciiva.com/29348/442529-da-01-en-chip-drossel-0805-220r-2000ma-2-0x1-25mm-29348007.pdf, Contact Plating=Tin,Matte, Core Material=Ferrite, Current Rating=2A, Código LNLS=AP105046, DC Current=2A, Depth=1.25mm, Height=0.85mm, Impedance=220R, Lead Free="Lead Free", Length=2mm, Manufacturer Part Number=BLM21PG221SN1D, Material=Steel,Ferrite, Max Current Rating=2A, Max DC Current=2A, Military Standard=Not, Number of Circuits=1, Number of Lines=1, Number of Pins=2, Packaging="Tape and Reel", Pricing 1="1=0.1, 10=0.081, 25=0.0732, 50=0.0538, 100=0.0464, 250=0.0366, 500=0.0309, 1000=0.0261 (USD)", Radiation Hardening=No, REACH SVHC="No SVHC", Shielding=Unshielded, Stock 1=879222, Supplier 1=RSComponents, Termination=SMD/SMT, Test Frequency=100MHz, Width=1.25mm
HL201 HL202: "SENSOR CURRENT FLUX 300MA AC/DC", Case/Package=Module, Current Sensing=300mA, Frequency=3.5kHz, Manufacturer=LEM, Manufacturer Part Number=CTSR0.3-P, Max Operating Temperature=105°C, Max Supply Current=21.6mA, Max Supply Voltage (DC)=5.25V, Min Operating Temperature=-40°C, Min Supply Voltage (DC)=4.75V, Package Quantity=25, Supplier Part Number 1=398-1112-ND, Accuracy=1.9%, Category="Current Sensors", ComponentLink1Description=https://datasheet.ciiva.com/2812/ctsr20series-2812567.pdf?src-supplier=Digi-Key, ComponentLink1URL=https://datasheet.ciiva.com/2812/ctsr20series-2812567.pdf?src-supplier=Digi-Key, ComponentLink2Description=https://datasheet.ciiva.com/30482/0900766b81272e9d-30482890.pdf?src-supplier=RSComponents, ComponentLink2URL=https://datasheet.ciiva.com/30482/0900766b81272e9d-30482890.pdf?src-supplier=RSComponents, Código LNLS=MC113908, Linearity=0.5%, Mount="Through Hole,PCB", Number of Channels=1, Operating Supply Voltage=5.25V, Overall Depth=17.9mm, Overall Height=44.6mm, Packaging=Bulk, Polarity=Bidirectional, Pricing 1="1=38,39000, 5=36,64400, 10=33,15500, 25=30,53760, 50=27,04760, 100=26,17500 (USD)", REACH SVHC="No SVHC", Response Time=50us, RoHS=Yes, Series=CTSR, Stock 1=1441, Supplier 1=Digi-Key, Wire/Cable Diameter=20.3mm
LD101 LD102: "LED BLUE CLEAR 2SMD R/A", Color=Blue, Current - Test=10mA, Lens Color=Colorless, Manufacturer="OSRAM Opto Semiconductors Inc.", Millicandela Rating=35mcd, Package / Case="2-SMD, Boomerang", Supplier Device Package=SMD, Supplier Part Number 1=475-1379-1-ND, Voltage - Forward (Vf) (Typ)=3.1V, Category=Optoelectronics, ComponentLink1Description=http://www.osram-os.com/Graphics/XPic4/00180889_0.pdf, ComponentLink1URL=http://www.osram-os.com/Graphics/XPic4/00180889_0.pdf, Código LNLS=AP112060, Features=-, Height (Max)=4.20mm, Lens Style/Size="Round with Flat Top, 2.40mm", Lens Transparency=Clear, Manufacturer Part Number="LB A673-L2P1-35-Z", Mounting Type="Surface Mount, Right Angle", Packaging="Cut Tape (CT)", Part Status=Active, Pricing 1="1=0.7, 10=0.548, 25=0.454, 100=0.3914, 250=0.3444, 500=0.29744, 1000=0.26091 (USD)", RoHS="RoHS Compliant", Size / Dimension="4.00mm L x 3.60mm W", Stock 1=7315, Supplier 1=Digi-Key, Viewing Angle=120°, Wavelength - Dominant=471nm, Wavelength - Peak=466nm
PB201 PB202: "PCB Switch 12 VDC 50 mA, SKHHLMA010, Alps", Color=Black, Contact Current Rating=50mA, Contact Resistance=100mR, Insulation Resistance=100MR, Manufacturer="Alps Electric", Max Operating Temperature=85°C, Max Voltage Rating (DC)=12V, Min Operating Temperature=-20°C, Operating Force=0.98N, Package Quantity=1000, Supplier Part Number 1=688-SKHHLM, Actuator Length=3.85mm, Actuator Type=STEM, Author="CERN DEM JLC", Category="Tactile Switches", ComponentLink1Description=https://datasheet.ciiva.com/25603/0900766b810d5f21-25603887.pdf?src-supplier=RSComponents, ComponentLink1URL=https://datasheet.ciiva.com/25603/0900766b810d5f21-25603887.pdf?src-supplier=RSComponents, ComponentLink2Description=https://datasheet.ciiva.com/14142/03564812-14142526.pdf?src-supplier=Distrelec, ComponentLink2URL=https://datasheet.ciiva.com/14142/03564812-14142526.pdf?src-supplier=Distrelec, Current Rating=50mA, Código LNLS="Nao Cadastrado", Depth=7.85mm, Electrical Life=1000000Cycles, Illumination Type=Illuminated, Lead Free="Lead Free", Length=7.5mm, Manufacturer Part Number=SKHHLMA010, Max Current Rating=50mA, Mechanical Life=1000000Cycles, Mount="Through Hole", Orientation="Right Angle", Packaging=Bulk, Pricing 1="1=0,77000, 10=0,77000, 50=0,73100, 100=0,70200, 500=0,65800, 1000=0,65800, 10000=0,65800 (USD)", Radiation Hardening=No, REACH SVHC=Unknown, RoHS=Yes, RoHS Compliant=Yes, Series=SKHH, Stock 1=5892, Supplier 1=Mouser, Termination=Solder, Throw Configuration=SPST, Voltage Rating (DC)=12V
R101 R102: library part "Resistor 499R", "RES SMD 499R OHM 1% 1/10W 0603", Case Code (Imperial)=0603, Case Code (Metric)=1608, Manufacturer=Yageo, Manufacturer Part Number=RC0603FR-07499RL, Max Operating Temperature=155°C, Max Power Dissipation=100mW, Min Operating Temperature=-55°C, Package Quantity=1, Resistor Type="Thick Film", Supplier Part Number 1=311-499HRCT-ND, Temperature Coefficient=100ppm/°C, Tolerance=1%, Voltage Rating=50V, Case/Package=0603, Category="Chip SMD Resistors", ComponentLink1Description=https://datasheet.ciiva.com/11808/0900766b80f96399-11808558.pdf?src-supplier=RSComponents, ComponentLink1URL=https://datasheet.ciiva.com/11808/0900766b80f96399-11808558.pdf?src-supplier=RSComponents, ComponentLink2Description=https://datasheet.ciiva.com/2453/pyu-r-int-thick-7-2453955.pdf?src-supplier=Digi-Key, ComponentLink2URL=https://datasheet.ciiva.com/2453/pyu-r-int-thick-7-2453955.pdf?src-supplier=Digi-Key, ComponentLink3Description=https://datasheet.ciiva.com/2453/pyu-r-int-thick-7-2453956.pdf?src-supplier=Digi-Key, ComponentLink3URL=https://datasheet.ciiva.com/2453/pyu-r-int-thick-7-2453956.pdf?src-supplier=Digi-Key, ComponentLink4Description=https://datasheet.ciiva.com/2453/pyu-r-int-thick-7-2453957.pdf?src-supplier=Digi-Key, ComponentLink4URL=https://datasheet.ciiva.com/2453/pyu-r-int-thick-7-2453957.pdf?src-supplier=Digi-Key, ComponentLink5Description=https://datasheet.ciiva.com/12558/rc0603-272842-12558391.pdf?src-supplier=Mouser, ComponentLink5URL=https://datasheet.ciiva.com/12558/rc0603-272842-12558391.pdf?src-supplier=Mouser, ComponentLink6Description=https://datasheet.ciiva.com/8885/pyu-rc0603-51-rohs-l-4-8885483.pdf?src-supplier=Avnet, ComponentLink6URL=https://datasheet.ciiva.com/8885/pyu-rc0603-51-rohs-l-4-8885483.pdf?src-supplier=Avnet, ComponentLink7Description=https://datasheet.ciiva.com/16874/pyu-rc0603-51-rohs-l-4-16874517.pdf?src-supplier=Avnet+Europe, ComponentLink7URL=https://datasheet.ciiva.com/16874/pyu-rc0603-51-rohs-l-4-16874517.pdf?src-supplier=Avnet+Europe, Construction=Rectangular, Contact Plating=Tin,Matte, Código LNLS="Nao Cadastrado", Depth=0.8mm, Features="Moisture Resistant", Height=0.45mm, Lead Free="Lead Free", Length=1.6mm, Military Standard=Not, Mount="Surface Mount", Number of Terminations=2, Packaging="Tape and Reel", Power Rating=100mW, Pricing 1="1=0,10000, 10=0,02400, 100=0,00970, 1000=0,00436, 2500=0,00378 (USD)", Radiation Hardening=No, Resistance=499R, RoHS=Yes, RoHS Compliant=Yes, Series=RC, Size Code=0603, Stock 1=94542, Supplier 1=Digi-Key, Technology="THICK FILM", Termination=SMD/SMT, Voltage Rating (DC)=50V, Width=0.031inch
R201 R202 R205 R206: library part "Resistor 15K", "RES SMD 15K OHM 1% 1/10W 0603", Case Code (Imperial)=0603, Case Code (Metric)=1608, Manufacturer="Stackpole Electronics", Manufacturer Part Number=RMCF0603FT15K0, Max Operating Temperature=155°C, Max Power Dissipation=100mW, Min Operating Temperature=-55°C, Resistance=15kR, Resistor Type="Thick Film", Supplier Part Number 1=RMCF0603FT15K0CT-ND, Temperature Coefficient=100ppm/°C, Tolerance=1%, Case/Package=0603, Category="Chip SMD Resistors", ComponentLink1Description=https://datasheet.ciiva.com/15193/getdatasheetpartid-372144-15193446.pdf?src-supplier=Verical, ComponentLink1URL=https://datasheet.ciiva.com/15193/getdatasheetpartid-372144-15193446.pdf?src-supplier=Verical, Construction=Rectangular, Contact Plating=Tin,Matte, Código LNLS="Nao Cadastrado", Depth=0.8mm, Features="Automotive AEC-Q200", Height=0.022inch, Lead Free="Lead Free", Length=0.061inch, Military Standard=Not, Mount="Surface Mount", Number of Terminations=2, Packaging="Tape and Reel", Power Rating=100mW, Pricing 1="1=0,10000, 10=0,01700, 100=0,00680, 1000=0,00305, 2500=0,00264 (USD)", Radiation Hardening=No, RoHS=Yes, RoHS Compliant=Yes, Series=RMCF, Size Code=0603, Stock 1=310779, Supplier 1=Digi-Key, Width=0.031inch
R203 R204 R207 R208: library part "Resistor 75K", "RES SMD 75K OHM 0.5% 1/10W 0603", Case Code (Imperial)=0603, Case Code (Metric)=1608, Manufacturer=Yageo, Manufacturer Part Number=RT0603DRD0775KL, Max Operating Temperature=155°C, Max Power Dissipation=100mW, Min Operating Temperature=-55°C, Package Quantity=1, Resistance=75kR, Resistor Type="Thin Film", Temperature Coefficient=25ppm/°C, Tolerance=0.5%, Voltage Rating=75V, Voltage Rating (DC)=50V, Case/Package=0603, Category="Chip SMD Resistors", ComponentLink1Description=https://datasheet.ciiva.com/12704/pyu-rt-1-to-0-05-rohs-l-4-12704869.pdf?src-supplier=Mouser, ComponentLink1URL=https://datasheet.ciiva.com/12704/pyu-rt-1-to-0-05-rohs-l-4-12704869.pdf?src-supplier=Mouser, Código LNLS=AP107384, Features="Moisture Resistant", Height=0.022inch, Lead Free="Lead Free", Length=0.063inch, Number of Terminations=2, Packaging="Tape and Reel", Power Rating=100mW, Pricing 1="1=0,17910, 10=0,11970, 25=0,11880, 5000=0,01990, 10000=0,01900, 25000=0,01820, 100000=0,01730 (USD)", RoHS=Yes, RoHS Compliant=Yes, Series=RT, Stock 1=82, Supplier 1="Arrow Electronics", Supplier Part Number 1=RT0603DRD0775KL, Termination=SMD/SMT, Width=0.031inch
S201: "Switch Slide ON None ON DPDT", Manufacturer="NKK Switches", Max Current Rating=100mA, Max Operating Temperature=85°C, Max Voltage Rating (AC)=28V, Min Operating Temperature=-30°C, Operating Force=260gf, Package Quantity=1, Supplier Part Number 1=360-2128-ND, Actuator Length=2.5mm, Actuator Material="Nylon,Glass,Polyamide,Glass fibre", Actuator Type=Standard, Category="Slide Switches", ComponentLink1Description=https://datasheet.ciiva.com/15184/getdatasheetpartid-450041-15184194.pdf?src-supplier=Verical, ComponentLink1URL=https://datasheet.ciiva.com/15184/getdatasheetpartid-450041-15184194.pdf?src-supplier=Verical, ComponentLink2Description=https://datasheet.ciiva.com/26326/702195-da-01-en-schiebes-dpdt-on-on-re-gew-anschl-b-26326751.pdf?src-supplier=Conrad, ComponentLink2URL=https://datasheet.ciiva.com/26326/702195-da-01-en-schiebes-dpdt-on-on-re-gew-anschl-b-26326751.pdf?src-supplier=Conrad, Contact Material=Bronze, Contact Plating=Gold, Contact Style=Non-Shorting, Código LNLS="Nao Cadastrado", Depth=15.2mm, Electrical Life=50000Cycles, Lead Free="Lead Free", Length=9.8mm, Manufacturer Part Number=AS22AH, Max Voltage Rating (DC)=28V, Mechanical Life=50000Cycles, Mount="Through Hole", Packaging=Tray, Pricing 1="1=6,09000, 10=5,55700, 25=5,05440, 100=4,36620, 300=3,96930, 500=3,67822, 1000=3,41360, 2400=3,27500 (USD)", RoHS=Yes, RoHS Compliant=Yes, Series=AS, Stock 1=1475, Supplier 1=Digi-Key, Switch Function=On-On, Switch Travel=2.5mm, Switching Voltage=28V, Termination="PC Pins", Throw Configuration=DPDT, Voltage Rating (AC)=28V, Voltage Rating (DC)=28V
TP101 TP102 TP103 TP104 TP105 TP106 TP201 TP202 TP203 TP204 TP205 TP206: library part "TEST POINT 5012", Color=White, Manufacturer="Keystone Electronics", Manufacturer Part Number=5012, Supplier Part Number 1=36-5012-ND, Category="Test and Measurement", ComponentLink1Description=http://www.keyelco.com/product-pdf.cfm?p=1321, ComponentLink1URL=http://www.keyelco.com/product-pdf.cfm?p=1321, Código LNLS=MT105229, Height=-, Material - Body="Phosphor Bronze", Material - Insulation="Nylon 46, UL 94V-0", Mounting Type="0.063\" (1.60mm) Hole Diameter", Packaging=Bulk, Part Status=Active, Plating=Silver, Pricing 1="1=0.37, 10=0.316, 50=0.2298, 100=0.2209, 250=0.19832, 500=0.18932, 1000=0.1616, 2500=0.14424, 5000=0.13523 (USD)", RoHS="RoHS Compliant", Size / Dimension="0.125\" Dia x 0.320\" L (3.18mm x 8.13mm)", Stock 1=132720, Supplier 1=Digi-Key, Type="PC Test Point, Multipurpose"
U101 U103: "Module DC-DC 2-OUT 15V/-15V 0.067A/-0.067A 2W 7-Pin SIP Tube", Case/Package=SIP, Current - Output 1=67mA, Isolation Voltage=1kV, Manufacturer=Recom, Max Input Voltage=18V, Max Operating Temperature=85°C, Max Output Power=2W, Max Output Voltage=15V, Min Input Voltage=9V, Min Operating Temperature=-40°C, Nominal Input Voltage=12V, Package Quantity=22, Supplier Part Number 1=945-1547-5-ND, Voltage - Output 2=-15V, Category="Board Mount Modules", ComponentLink1Description=https://datasheet.ciiva.com/11837/0900766b80518158-11837172.pdf?src-supplier=RSComponents, ComponentLink1URL=https://datasheet.ciiva.com/11837/0900766b80518158-11837172.pdf?src-supplier=RSComponents, ComponentLink2Description=https://datasheet.ciiva.com/29336/154838-da-01-en-dc-dc-wandler-29336507.pdf?src-supplier=Conrad, ComponentLink2URL=https://datasheet.ciiva.com/29336/154838-da-01-en-dc-dc-wandler-29336507.pdf?src-supplier=Conrad, ComponentLink3Description=https://datasheet.ciiva.com/2179/rs-s-d-z-2179956.pdf?src-supplier=Digi-Key, ComponentLink3URL=https://datasheet.ciiva.com/2179/rs-s-d-z-2179956.pdf?src-supplier=Digi-Key, ComponentLink4Description=https://datasheet.ciiva.com/3356/ryrs-3356389.pdf?src-supplier=Distrelec, ComponentLink4URL=https://datasheet.ciiva.com/3356/ryrs-3356389.pdf?src-supplier=Distrelec, ComponentLink5Description=https://datasheet.ciiva.com/46404/1842335-46404424.pdf?src-supplier=Element14, ComponentLink5URL=https://datasheet.ciiva.com/46404/1842335-46404424.pdf?src-supplier=Element14, Current - Output 2=67mA, Código LNLS="Nao Cadastrado", Depth=9.2mm, Efficiency=80%, Features=SCP, Height=11.1mm, Isolation=Isolated, Lead Free="Lead Free", Length=21.8mm, Manufacturer Part Number=RS-1215D, Max Input Voltage (DC)=18V, Max Output Current=67mA, Max Power Dissipation=2W, Min Input Voltage (DC)=9V, Mount="Through Hole,PCB", Number of Outputs=2, Number of Pins=7, Output Current=67mA, Output Power=2W, Output Voltage=15V, Packaging=Rail/Tube, Pricing 1="1=18,77000, 5=18,62400, 10=18,48000, 25=18,19120, 50=17,32500, 100=15,88120, 250=15,59248, 440=15,40000 (USD)", REACH SVHC="No SVHC", RoHS=Yes, RoHS Compliant=Yes, Series=RS, Stock 1=312, Supplier 1=Digi-Key, Voltage - Output 1=15V, Weight=4.7g, Width=9.2mm
U102 U104: "CONV DC/DC 5V 500MA OUT THRU", Case/Package=SIP, Current - Output 1=500mA, Manufacturer=Recom, Max Input Voltage=28V, Max Operating Temperature=85°C, Max Output Power=2.5W, Max Output Voltage=5V, Max Power Dissipation=3W, Min Input Voltage=7V, Min Operating Temperature=-40°C, Package Quantity=42, Supplier Part Number 1=945-1648-5-ND, ComponentLink1Description=https://datasheet.ciiva.com/7618/1518729-7618512.pdf, ComponentLink1URL=https://datasheet.ciiva.com/7618/1518729-7618512.pdf, ComponentLink2Description=https://datasheet.ciiva.com/16366/r-78exx-0-5-16366357.pdf, ComponentLink2URL=https://datasheet.ciiva.com/16366/r-78exx-0-5-16366357.pdf, ComponentLink3Description=https://datasheet.ciiva.com/14155/r78xx-05-eng-datasheet-14155703.pdf, ComponentLink3URL=https://datasheet.ciiva.com/14155/r78xx-05-eng-datasheet-14155703.pdf, ComponentLink4Description=https://datasheet.ciiva.com/25627/0900766b810a2db7-25627246.pdf, ComponentLink4URL=https://datasheet.ciiva.com/25627/0900766b810a2db7-25627246.pdf, ComponentLink5Description=https://datasheet.ciiva.com/2168/r-78exx-0-5-02-2168671.pdf, ComponentLink5URL=https://datasheet.ciiva.com/2168/r-78exx-0-5-02-2168671.pdf, Código LNLS=AP105018, Depth=11.6mm, Efficiency=92%, Height=10.4mm, Isolation=Non-Isolated, Lead Free="Lead Free", Length=11.6mm, Manufacturer Part Number=R-78E5.0-0.5, Max Input Voltage (DC)=28V, Max Output Current=500mA, Min Input Voltage (DC)=7V, Mount="Through Hole,PCB", Nominal Output Voltage=5V, Number of Outputs=1, Number of Pins=3, Output Current=500mA, Output Power=2.5W, Output Voltage=5V, Packaging=Rail/Tube, Power Rating=2.5W, Pricing 1="1=2.7, 5=2.656, 10=2.618, 25=2.5412, 50=2.464, 100=2.387, 250=2.31, 500=2.156 (USD)", REACH SVHC="No SVHC", Stock 1=10893, Supplier 1=Digi-Key, Voltage - Output 1=5V, Weight=2g, Width=8.5mm
U201 U202: "TEXAS INSTRUMENTS - OPA227U - OP AMP, PRECISION, SOIC8, 227", Case/Package=D, Dual Supply Voltage=9V, Input Bias Current=10nA, Input Offset Voltage (Vos)=75uV, Manufacturer="Texas Instruments", Max Dual Supply Voltage=18V, Max Operating Temperature=85°C, Min Dual Supply Voltage=2.5V, Min Operating Temperature=-40°C, Nominal Supply Current=3.8mA, Operating Supply Current=3.7mA, Output Current=45mA, Package Quantity=75, Power Supply Rejection Ratio (PSRR)=126.02dB, Supplier Part Number 1=595-OPA227U, Voltage Gain=160dB, Bandwidth=8MHz, Category="Amplifiers - Op Amps, Buffer, Instrumentation", Common Mode Rejection Ratio=120dB, ComponentLink1Description=https://datasheet.ciiva.com/26853/opa227u-26853600.pdf?src-supplier=IIIC, ComponentLink1URL=https://datasheet.ciiva.com/26853/opa227u-26853600.pdf?src-supplier=IIIC, ComponentLink2Description=https://datasheet.ciiva.com/7738/1830992-7738349.pdf?src-supplier=Element14, ComponentLink2URL=https://datasheet.ciiva.com/7738/1830992-7738349.pdf?src-supplier=Element14, ComponentLink3Description=https://datasheet.ciiva.com/1800/opa227-1800390.pdf?src-supplier=Digi-Key, ComponentLink3URL=https://datasheet.ciiva.com/1800/opa227-1800390.pdf?src-supplier=Digi-Key, Contact Plating=Gold, Código LNLS=AP104167, Gain Bandwidth Product=8MHz, Height=1.58mm, Lead Free="Lead Free", Length=4.9mm, Manufacturer Part Number=OPA227U, Max I/O Voltage=75uV, Max Supply Voltage=18V, Nominal Gain Bandwidth Product=8MHz, Number of Amplifiers=1, Number of Channels=1, Number of Circuits=1, Number of Elements=1, Number of Pins=8, Output Current per Channel=45mA, Packaging=Rail/Tube, Pricing 1="1=7,63000, 10=6,89000, 25=6,57000, 50=6,57000, 100=5,70000, 1000=5,44000, 10000=5,44000 (USD)", Radiation Hardening=No, REACH SVHC="No SVHC", RoHS=Yes, RoHS Compliant=Yes, Slew Rate=2.3V/µs, Stock 1=34, Supplier 1=Mouser, Unity Gain Bandwidth Product=8MHz, Width=3.91mm

## Free pads (board coordinates)
  round 3 hole 3: 1(20,27.255) 2(20,39.755) 3(20,52.255) 4(100,27.255) 5(100,39.755) 6(100,52.255)

## Via types
v1: diameter 1.27, hole 0.711, Top Layer to Bottom Layer, 2 vias

## Nets (pads, with @x,y where several pads share a name; then routed paths per layer and width w, separated by ;. In a path a pad name is that pad's centre, name@x,y a point inside that pad or via, vN(x,y) a via of type N, cw(c..) or ccw(c..) an arc to the next point about the centre after c; other vN are vias at no path point)
"+5V ISO A": C109.2 C110.2 C201.1 FB103.2 HL201.1 LD101.2 TP103.1 | length 74.1
  Top Layer w0.5: LD101.2 13.75,78.67 14.43,79.35 20.48,79.35 21.5,78.33 TP103.1
  Top Layer w1: TP103.1 21.5,57.3 26.9,51.9 26.9,49.92 29.62,47.2 34.35,47.2 36.43,45.12 40.36,45.12 43.2,42.28 43.2,33.2 41.8,31.8 HL201.1
"+5V ISO B": C119.2 C120.2 C207.1 FB106.2 HL202.1 LD102.2 TP106.1 | length 56.4
  Top Layer w0.5: TP106.1 98.5,74.89 99.609,75.999 LD102.2
  Top Layer w1: HL202.1 90.3,31.8 89,33.1 89,48.1 90.7,49.8 93.1,49.8 95.4,52.1 95.4,57.1 98.5,60.2 TP106.1
+15V: CN101.1 CN102.2 CN102.4 FB101.1 FB104.1
"+15V ISO A": C103.2 C104.2 C203.2 C204.2 FB102.1 TP101.1 U101.6 U201.7 | length 60.1
  Top Layer w1: TP101.1 27.9,66.63 26.73,65.46 26.73,60.87 28.17,59.43 41.47,59.43 42.7,58.2 U101.6
  Bottom Layer w1: U101.6 42.7,57.92 44.18,59.4 55.3,59.4 57.76,56.94 FB102.1
"+15V ISO B": C113.2 C114.2 C209.2 C210.2 FB105.1 TP104.1 U103.6 U202.7 | length 61.8
  Top Layer w1: U103.6 77.4,55.98 77.4,53.4 78.6,52.2 91.7,52.2 93,53.5 93,58.4 92.1,59.3 TP104.1
  Bottom Layer w1: FB105.1 66,57 68.4,59.4 75.9,59.4 77.38,57.92 U103.6
"-15V ISO A": C105.2 C106.2 C205.2 C206.2 TP102.1 U101.8 U201.4 | length 56.5
  Top Layer w1: TP102.1 34.3,73.23 33.15,74.38 26.28,74.38 24.71,72.81 24.71,57.2 28.99,52.92 46.68,52.92 47.78,54.02 U101.8
  Bottom Layer w0.254: C105.2@50.257,52.75 C105.2
"-15V ISO B": C115.2 C116.2 C211.2 C212.2 TP105.1 U103.8 U202.4 | length 26.3
  Top Layer w1: U103.8 72.3,58.6 73.6,59.9 84.2,59.9 85.7,61.4 TP105.1
GND: C101.1 C102.1 C111.1 C112.1 CN101.2 CN102.1 CN102.3 U101.1 U103.1
  other v1: 37.6,48.6 82.5,48.6
"GND ISO A": C103.1 C104.1 C105.1 C106.1 C107.1 C108.1 C109.1 C110.1 C201.2 C202.2 C203.1 C204.1 C205.1 C206.1 CN201.3 HL201.2 HL201.5 HL201.6 PB201.1 PB201.3 PB201.4 R101.1 R203.1 S201.6 TP203.1 U101.7 U102.2 | length 70.9
  Bottom Layer w0.254: PB201.4 PB201.4@9.83,72.42
  Bottom Layer w1: PB201.4 16.8,72.5 19.7,75.4 38.9,75.4 40.679,73.621 TP203.1@40.679,70.521 ; TP203.1 40.776,70.424 40.776,68.094 41.84,67.03 44.57,67.03 46.94,69.4 49.76,69.4 50.98,70.62 50.98,73.59 52.32,74.93 60.69,74.93 64.06,71.56 S201.6
"GND ISO B": C113.1 C114.1 C115.1 C116.1 C117.1 C118.1 C119.1 C120.1 C207.2 C208.2 C209.1 C210.1 C211.1 C212.1 CN202.3 HL202.2 HL202.5 HL202.6 PB202.1 PB202.3 PB202.4 R102.1 R207.1 S201.4 TP206.1 U103.7 U104.2 | length 46.8